# Altium PCB PcbPanel.PcbDoc
Units mm, origin at the board's own origin, x right, y up, seen from the top; angles counter-clockwise.
Board outline 180 x 105.6 mm, 2 copper layers (Top Layer, Bottom Layer), stack 1.092 mm thick; 6 components, 178 nets, 10 pads, 0 vias.
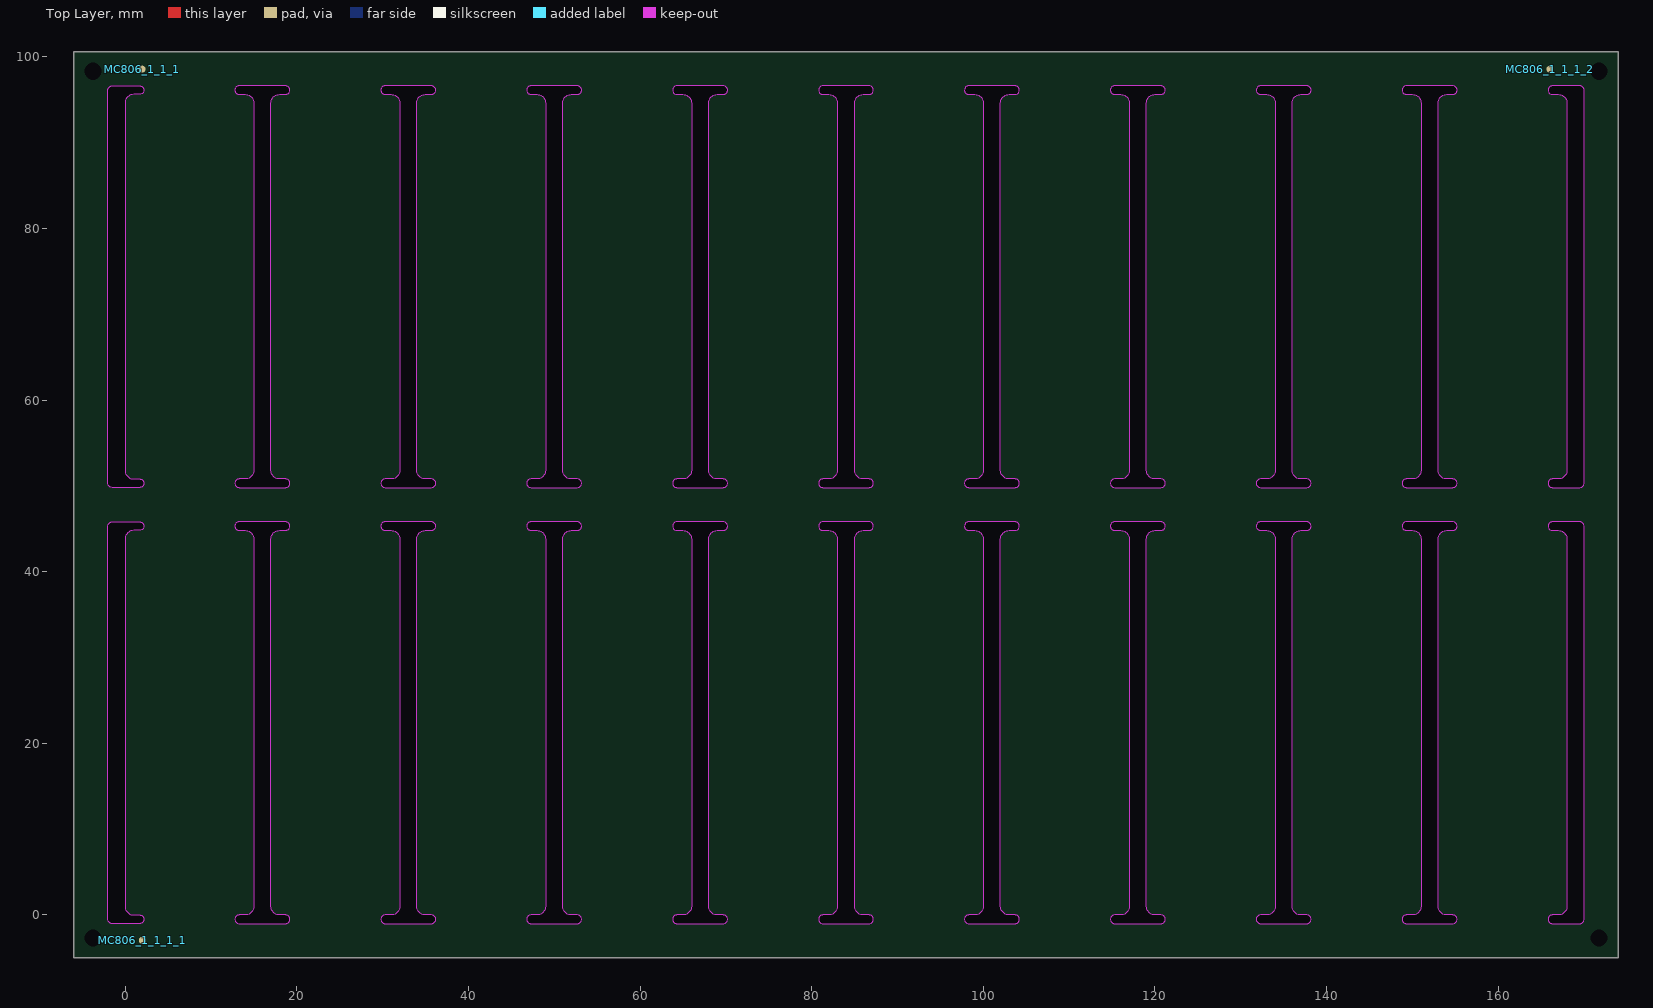
[diagram p0: Top Layer view]
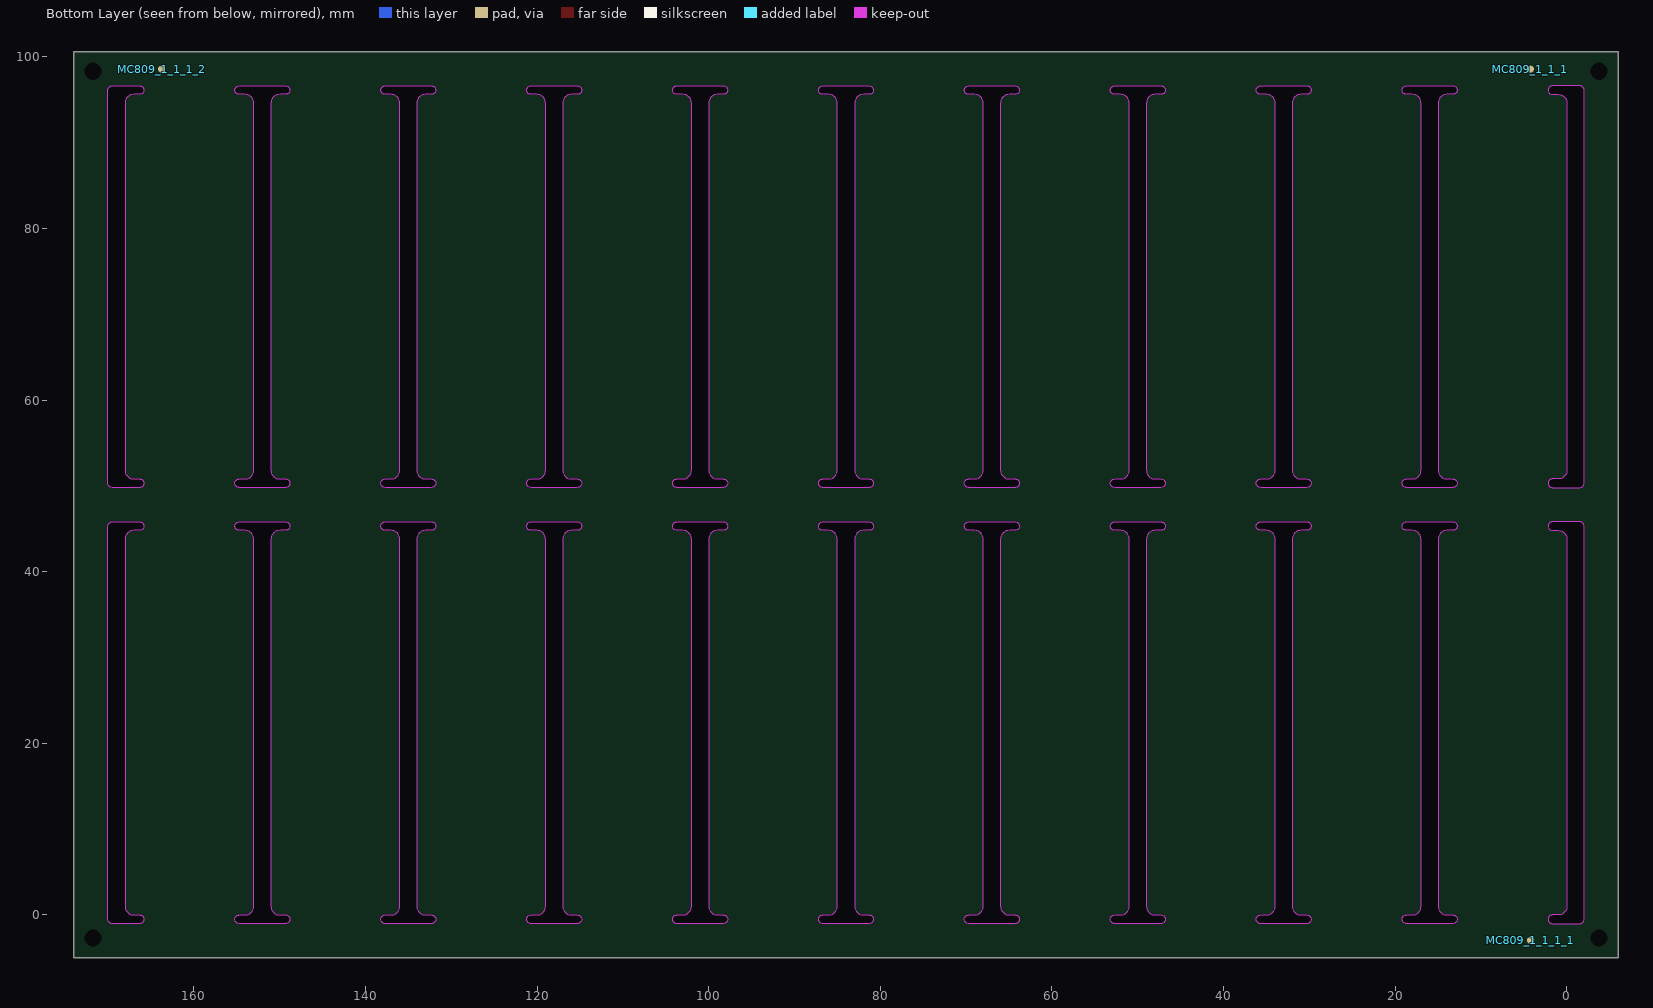
[diagram p1: Bottom Layer view, seen from below]

## Layer stack, top to bottom
Top Solder: solder mask 0.0102, SM-001, Dk 4
Top Layer: signal copper 0.0356
Dielectric 1: prepreg 0.2104, PP-017, Dk 4.3
Dielectric 3: core 0.6, Core-039, Dk 4.8
Dielectric 5: prepreg 0.2104, PP-017, Dk 4.3
Bottom Layer: signal copper 0.0356
Bottom Solder: solder mask 0.0102, SM-001, Dk 4

## Board outline
-6,-5 -6,100.6 174,100.6 174,-5
cut-out: -2,50.3 -2,96.1 cw(c-1.5,96.1) -1.5,96.6 1.7,96.6 cw(c1.7,96.1) 2.2,96.1 cw(c1.7,96.1) 1.7,95.6 1,95.6 ccw(c1,94.6) 0,94.6 0,51.8 ccw(c1,51.8) 1,50.8 1.7,50.8 cw(c1.7,50.3) 2.2,50.3 cw(c1.7,50.3) 1.7,49.8 -1.5,49.8 cw(c-1.5,50.3)
cut-out: 12.8,50.3 ccw(c13.3,50.3) 13.3,49.8 18.7,49.8 ccw(c18.7,50.3) 19.2,50.3 ccw(c18.7,50.3) 18.7,50.8 18,50.8 cw(c18,51.8) 17,51.8 17,94.6 cw(c18,94.6) 18,95.6 18.7,95.6 ccw(c18.7,96.1) 19.2,96.1 ccw(c18.7,96.1) 18.7,96.6 13.3,96.6 ccw(c13.3,96.1) 12.8,96.1 ccw(c13.3,96.1) 13.3,95.6 14,95.6 cw(c14,94.6) 15,94.6 15,51.8 cw(c14,51.8) 14,50.8 13.3,50.8 ccw(c13.3,50.3)
cut-out: 29.8,50.3 ccw(c30.3,50.3) 30.3,49.8 35.7,49.8 ccw(c35.7,50.3) 36.2,50.3 ccw(c35.7,50.3) 35.7,50.8 35,50.8 cw(c35,51.8) 34,51.8 34,94.6 cw(c35,94.6) 35,95.6 35.7,95.6 ccw(c35.7,96.1) 36.2,96.1 ccw(c35.7,96.1) 35.7,96.6 30.3,96.6 ccw(c30.3,96.1) 29.8,96.1 ccw(c30.3,96.1) 30.3,95.6 31,95.6 cw(c31,94.6) 32,94.6 32,51.8 cw(c31,51.8) 31,50.8 30.3,50.8 ccw(c30.3,50.3)
cut-out: 46.8,50.3 ccw(c47.3,50.3) 47.3,49.8 52.7,49.8 ccw(c52.7,50.3) 53.2,50.3 ccw(c52.7,50.3) 52.7,50.8 52,50.8 cw(c52,51.8) 51,51.8 51,94.6 cw(c52,94.6) 52,95.6 52.7,95.6 ccw(c52.7,96.1) 53.2,96.1 ccw(c52.7,96.1) 52.7,96.6 47.3,96.6 ccw(c47.3,96.1) 46.8,96.1 ccw(c47.3,96.1) 47.3,95.6 48,95.6 cw(c48,94.6) 49,94.6 49,51.8 cw(c48,51.8) 48,50.8 47.3,50.8 ccw(c47.3,50.3)
cut-out: 63.8,50.3 ccw(c64.3,50.3) 64.3,49.8 69.7,49.8 ccw(c69.7,50.3) 70.2,50.3 ccw(c69.7,50.3) 69.7,50.8 69,50.8 cw(c69,51.8) 68,51.8 68,94.6 cw(c69,94.6) 69,95.6 69.7,95.6 ccw(c69.7,96.1) 70.2,96.1 ccw(c69.7,96.1) 69.7,96.6 64.3,96.6 ccw(c64.3,96.1) 63.8,96.1 ccw(c64.3,96.1) 64.3,95.6 65,95.6 cw(c65,94.6) 66,94.6 66,51.8 cw(c65,51.8) 65,50.8 64.3,50.8 ccw(c64.3,50.3)
cut-out: 80.8,50.3 ccw(c81.3,50.3) 81.3,49.8 86.7,49.8 ccw(c86.7,50.3) 87.2,50.3 ccw(c86.7,50.3) 86.7,50.8 86,50.8 cw(c86,51.8) 85,51.8 85,94.6 cw(c86,94.6) 86,95.6 86.7,95.6 ccw(c86.7,96.1) 87.2,96.1 ccw(c86.7,96.1) 86.7,96.6 81.3,96.6 ccw(c81.3,96.1) 80.8,96.1 ccw(c81.3,96.1) 81.3,95.6 82,95.6 cw(c82,94.6) 83,94.6 83,51.8 cw(c82,51.8) 82,50.8 81.3,50.8 ccw(c81.3,50.3)
cut-out: 97.8,50.3 ccw(c98.3,50.3) 98.3,49.8 103.7,49.8 ccw(c103.7,50.3) 104.2,50.3 ccw(c103.7,50.3) 103.7,50.8 103,50.8 cw(c103,51.8) 102,51.8 102,94.6 cw(c103,94.6) 103,95.6 103.7,95.6 ccw(c103.7,96.1) 104.2,96.1 ccw(c103.7,96.1) 103.7,96.6 98.3,96.6 ccw(c98.3,96.1) 97.8,96.1 ccw(c98.3,96.1) 98.3,95.6 99,95.6 cw(c99,94.6) 100,94.6 100,51.8 cw(c99,51.8) 99,50.8 98.3,50.8 ccw(c98.3,50.3)
cut-out: 114.8,50.3 ccw(c115.3,50.3) 115.3,49.8 120.7,49.8 ccw(c120.7,50.3) 121.2,50.3 ccw(c120.7,50.3) 120.7,50.8 120,50.8 cw(c120,51.8) 119,51.8 119,94.6 cw(c120,94.6) 120,95.6 120.7,95.6 ccw(c120.7,96.1) 121.2,96.1 ccw(c120.7,96.1) 120.7,96.6 115.3,96.6 ccw(c115.3,96.1) 114.8,96.1 ccw(c115.3,96.1) 115.3,95.6 116,95.6 cw(c116,94.6) 117,94.6 117,51.8 cw(c116,51.8) 116,50.8 115.3,50.8 ccw(c115.3,50.3)
cut-out: 131.8,50.3 ccw(c132.3,50.3) 132.3,49.8 137.7,49.8 ccw(c137.7,50.3) 138.2,50.3 ccw(c137.7,50.3) 137.7,50.8 137,50.8 cw(c137,51.8) 136,51.8 136,94.6 cw(c137,94.6) 137,95.6 137.7,95.6 ccw(c137.7,96.1) 138.2,96.1 ccw(c137.7,96.1) 137.7,96.6 132.3,96.6 ccw(c132.3,96.1) 131.8,96.1 ccw(c132.3,96.1) 132.3,95.6 133,95.6 cw(c133,94.6) 134,94.6 134,51.8 cw(c133,51.8) 133,50.8 132.3,50.8 ccw(c132.3,50.3)
cut-out: 148.8,50.3 ccw(c149.3,50.3) 149.3,49.8 154.7,49.8 ccw(c154.7,50.3) 155.2,50.3 ccw(c154.7,50.3) 154.7,50.8 154,50.8 cw(c154,51.8) 153,51.8 153,94.6 cw(c154,94.6) 154,95.6 154.7,95.6 ccw(c154.7,96.1) 155.2,96.1 ccw(c154.7,96.1) 154.7,96.6 149.3,96.6 ccw(c149.3,96.1) 148.8,96.1 ccw(c149.3,96.1) 149.3,95.6 150,95.6 cw(c150,94.6) 151,94.6 151,51.8 cw(c150,51.8) 150,50.8 149.3,50.8 ccw(c149.3,50.3)
cut-out: 165.8,50.3 ccw(c166.3,50.3) 166.3,49.8 169.5,49.8 ccw(c169.5,50.3) 170,50.3 170,96.1 ccw(c169.5,96.1) 169.5,96.6 166.3,96.6 ccw(c166.3,96.1) 165.8,96.1 ccw(c166.3,96.1) 166.3,95.6 167,95.6 cw(c167,94.6) 168,94.6 168,51.8 cw(c167,51.8) 167,50.8 166.3,50.8 ccw(c166.3,50.3)
cut-out: 165.8,-0.5 ccw(c166.3,-0.5) 166.3,-1 169.5,-1 ccw(c169.5,-0.5) 170,-0.5 170,45.3 ccw(c169.5,45.3) 169.5,45.8 166.3,45.8 ccw(c166.3,45.3) 165.8,45.3 ccw(c166.3,45.3) 166.3,44.8 167,44.8 cw(c167,43.8) 168,43.8 168,1 cw(c167,1) 167,0 166.3,0 ccw(c166.3,-0.5)
cut-out: 148.8,-0.5 ccw(c149.3,-0.5) 149.3,-1 154.7,-1 ccw(c154.7,-0.5) 155.2,-0.5 ccw(c154.7,-0.5) 154.7,0 154,0 cw(c154,1) 153,1 153,43.8 cw(c154,43.8) 154,44.8 154.7,44.8 ccw(c154.7,45.3) 155.2,45.3 ccw(c154.7,45.3) 154.7,45.8 149.3,45.8 ccw(c149.3,45.3) 148.8,45.3 ccw(c149.3,45.3) 149.3,44.8 150,44.8 cw(c150,43.8) 151,43.8 151,1 cw(c150,1) 150,0 149.3,0 ccw(c149.3,-0.5)
cut-out: 131.8,-0.5 ccw(c132.3,-0.5) 132.3,-1 137.7,-1 ccw(c137.7,-0.5) 138.2,-0.5 ccw(c137.7,-0.5) 137.7,0 137,0 cw(c137,1) 136,1 136,43.8 cw(c137,43.8) 137,44.8 137.7,44.8 ccw(c137.7,45.3) 138.2,45.3 ccw(c137.7,45.3) 137.7,45.8 132.3,45.8 ccw(c132.3,45.3) 131.8,45.3 ccw(c132.3,45.3) 132.3,44.8 133,44.8 cw(c133,43.8) 134,43.8 134,1 cw(c133,1) 133,0 132.3,0 ccw(c132.3,-0.5)
cut-out: 114.8,-0.5 ccw(c115.3,-0.5) 115.3,-1 120.7,-1 ccw(c120.7,-0.5) 121.2,-0.5 ccw(c120.7,-0.5) 120.7,0 120,0 cw(c120,1) 119,1 119,43.8 cw(c120,43.8) 120,44.8 120.7,44.8 ccw(c120.7,45.3) 121.2,45.3 ccw(c120.7,45.3) 120.7,45.8 115.3,45.8 ccw(c115.3,45.3) 114.8,45.3 ccw(c115.3,45.3) 115.3,44.8 116,44.8 cw(c116,43.8) 117,43.8 117,1 cw(c116,1) 116,0 115.3,0 ccw(c115.3,-0.5)
cut-out: 97.8,-0.5 ccw(c98.3,-0.5) 98.3,-1 103.7,-1 ccw(c103.7,-0.5) 104.2,-0.5 ccw(c103.7,-0.5) 103.7,0 103,0 cw(c103,1) 102,1 102,43.8 cw(c103,43.8) 103,44.8 103.7,44.8 ccw(c103.7,45.3) 104.2,45.3 ccw(c103.7,45.3) 103.7,45.8 98.3,45.8 ccw(c98.3,45.3) 97.8,45.3 ccw(c98.3,45.3) 98.3,44.8 99,44.8 cw(c99,43.8) 100,43.8 100,1 cw(c99,1) 99,0 98.3,0 ccw(c98.3,-0.5)
cut-out: 80.8,-0.5 ccw(c81.3,-0.5) 81.3,-1 86.7,-1 ccw(c86.7,-0.5) 87.2,-0.5 ccw(c86.7,-0.5) 86.7,0 86,0 cw(c86,1) 85,1 85,43.8 cw(c86,43.8) 86,44.8 86.7,44.8 ccw(c86.7,45.3) 87.2,45.3 ccw(c86.7,45.3) 86.7,45.8 81.3,45.8 ccw(c81.3,45.3) 80.8,45.3 ccw(c81.3,45.3) 81.3,44.8 82,44.8 cw(c82,43.8) 83,43.8 83,1 cw(c82,1) 82,0 81.3,0 ccw(c81.3,-0.5)
cut-out: 63.8,-0.5 ccw(c64.3,-0.5) 64.3,-1 69.7,-1 ccw(c69.7,-0.5) 70.2,-0.5 ccw(c69.7,-0.5) 69.7,0 69,0 cw(c69,1) 68,1 68,43.8 cw(c69,43.8) 69,44.8 69.7,44.8 ccw(c69.7,45.3) 70.2,45.3 ccw(c69.7,45.3) 69.7,45.8 64.3,45.8 ccw(c64.3,45.3) 63.8,45.3 ccw(c64.3,45.3) 64.3,44.8 65,44.8 cw(c65,43.8) 66,43.8 66,1 cw(c65,1) 65,0 64.3,0 ccw(c64.3,-0.5)
cut-out: 46.8,-0.5 ccw(c47.3,-0.5) 47.3,-1 52.7,-1 ccw(c52.7,-0.5) 53.2,-0.5 ccw(c52.7,-0.5) 52.7,0 52,0 cw(c52,1) 51,1 51,43.8 cw(c52,43.8) 52,44.8 52.7,44.8 ccw(c52.7,45.3) 53.2,45.3 ccw(c52.7,45.3) 52.7,45.8 47.3,45.8 ccw(c47.3,45.3) 46.8,45.3 ccw(c47.3,45.3) 47.3,44.8 48,44.8 cw(c48,43.8) 49,43.8 49,1 cw(c48,1) 48,0 47.3,0 ccw(c47.3,-0.5)
cut-out: 29.8,-0.5 ccw(c30.3,-0.5) 30.3,-1 35.7,-1 ccw(c35.7,-0.5) 36.2,-0.5 ccw(c35.7,-0.5) 35.7,0 35,0 cw(c35,1) 34,1 34,43.8 cw(c35,43.8) 35,44.8 35.7,44.8 ccw(c35.7,45.3) 36.2,45.3 ccw(c35.7,45.3) 35.7,45.8 30.3,45.8 ccw(c30.3,45.3) 29.8,45.3 ccw(c30.3,45.3) 30.3,44.8 31,44.8 cw(c31,43.8) 32,43.8 32,1 cw(c31,1) 31,0 30.3,0 ccw(c30.3,-0.5)
cut-out: 12.8,-0.5 ccw(c13.3,-0.5) 13.3,-1 18.7,-1 ccw(c18.7,-0.5) 19.2,-0.5 ccw(c18.7,-0.5) 18.7,0 18,0 cw(c18,1) 17,1 17,43.8 cw(c18,43.8) 18,44.8 18.7,44.8 ccw(c18.7,45.3) 19.2,45.3 ccw(c18.7,45.3) 18.7,45.8 13.3,45.8 ccw(c13.3,45.3) 12.8,45.3 ccw(c13.3,45.3) 13.3,44.8 14,44.8 cw(c14,43.8) 15,43.8 15,1 cw(c14,1) 14,0 13.3,0 ccw(c13.3,-0.5)
cut-out: -2,-0.5 -2,45.3 cw(c-1.5,45.3) -1.5,45.8 1.7,45.8 cw(c1.7,45.3) 2.2,45.3 cw(c1.7,45.3) 1.7,44.8 1,44.8 ccw(c1,43.8) 0,43.8 0,1 ccw(c1,1) 1,0 1.7,0 cw(c1.7,-0.5) 2.2,-0.5 cw(c1.7,-0.5) 1.7,-1 -1.5,-1 cw(c-1.5,-0.5)

## Design rules (kind name [scope] priority, off if disabled: settings)
AssemblyTestPointUsage [All] p1: valid=2
AssemblyTestpoint [(IsPad And (OnTopLayer Or OnBottomLayer))] p1: testpointundercomponent=FALSE minsize=1.016 maxsize=2.54 preferedsize=1.524 minholesize=0 maxholesize=1.016 preferedholesize=0.813 testpointgrid=0.025 usegrid=TRUE gridtolerance=0 allowsidebottom=TRUE
BoardOutlineClearance [All] p1: gap=0.1 ignorepadtopadclearanceinfootprint=FALSE
Clearance [All] p1: gap=0.14 ignorepadtopadclearanceinfootprint=FALSE
ComponentClearance [All] p1 off: gap=0.254 collisioncheckmode=3 verticalgap=0.254 showdistances=FALSE
DiffPairsRouting [All] p1: maxlimit=0.254 minlimit=0.15 mostfreqgap=0.254 toplayer_minwidth=0.14 toplayer_maxwidth=0.381 toplayer_prefwidth=0.2 bottomlayer_minwidth=0.14 bottomlayer_maxwidth=0.381 bottomlayer_prefwidth=0.2 maxuncoupledlength=12.7
Height [All] p1: minheight=0 maxheight=100.4 prefheight=12.7
HoleSize [All] p1: absolutevalues=TRUE maxlimit=10 minlimit=0.127 maxpercent=80.000 minpercent=20.000
HoleToHoleClearance [All] p1: gap=0.241 allowstackedmicrovias=TRUE
MinimumAnnularRing [All] p1: minimumring=0.051
MinimumSolderMaskSliver [All] p1: minsoldermaskwidth=0.05
PasteMaskExpansion [All] p1: expansion=-0.05
PolygonConnect PWR [InNetClass('PWR') vs InNetClass('PWR')] p1: connectstyle=Direct reliefconductorwidth=0.254 reliefentries=4 polygonreliefangle="90 Angle" airgapwidth=0.254
PolygonConnect RF_GND [InNamedPolygon('GND_BOTTOM_RF')] p2: thpad.connectstyle=Relief thpad.reliefconductorwidth=0.254 thpad.reliefentries=4 thpad.polygonreliefangle="90 Angle" thpad.airgapwidth=0.1 smdpad.connectstyle=Relief smdpad.reliefconductorwidth=0.254 smdpad.reliefentries=4 smdpad.polygonreliefangle="90 Angle" smdpad.airgapwidth=0.1 via.connectstyle=Direct via.reliefconductorwidth=0.254 via.reliefentries=4 via.polygonreliefangle="90 Angle" via.airgapwidth=0.254
PolygonConnect GND [InNet('GND')] p3: thpad.connectstyle=Relief thpad.reliefconductorwidth=0.254 thpad.reliefentries=4 thpad.polygonreliefangle="90 Angle" thpad.airgapwidth=0.254 smdpad.connectstyle=Relief smdpad.reliefconductorwidth=0.254 smdpad.reliefentries=4 smdpad.polygonreliefangle="90 Angle" smdpad.airgapwidth=0.254 via.connectstyle=Direct via.reliefconductorwidth=0.254 via.reliefentries=4 via.polygonreliefangle="90 Angle" via.airgapwidth=0.254
PolygonConnect [All] p4: connectstyle=Direct reliefconductorwidth=0.254 reliefentries=4 polygonreliefangle="90 Angle" airgapwidth=0.254
RoutingVias [All] p1: holewidth=0.15 width=0.35 viastyle="Through Hole" minholewidth=0.127 minwidth=0.25 maxholewidth=0.6 maxwidth=1
SilkToSilkClearance [All] p1: silktosilkclearance=0.05
SilkToSolderMaskClearance [IsPad] p1: minsilkscreentomaskgap=0.05 clearancetoexposedcopper=TRUE
SolderMaskExpansion SolderMaskExpansion_via [IsVia] p1: expansion=0.102 istentingtop=TRUE
SolderMaskExpansion [All] p2: expansion=0.025 istentingtop=FALSE
UnRoutedNet [All] p1: checkbadconnections=TRUE
ViasUnderSMD [All] p1: allowed=TRUE
Width RF [InNetClass('RF')] p1: maxlimit=0.762 minlimit=0.154 preferedwidth=0.236 minimp=50.000000 maximp=50.000000 favimp=50.000000
Width [All] p2: maxlimit=30 minlimit=0.122 preferedwidth=0.2
18 further rules are at their usual default settings.

## Classes and differential pairs
net class RF: RF1 RF2 RF3
component class U_LED: Q14 TP1 TP31 U20
component class PABoostConverter: TP14 TP15 TP16
net class PWR: 3V0 5V0 PA_GATE_SWITCH PA_I_DIFF_N PA_I_DIFF_P PA_PRE_L PA_PST_L PABOOST_SW V_LOAD V_PA V_SYS

## Components (designator, comment, footprint, x,y, rotation, side; value= is the part's Value field where it differs from the comment)
MC806_1_1_1 "Mire_CMS" CMSMires 2,98.55 r90 top (schematic designator MC804)
MC806_1_1_1_1 "Mire_CMS" CMSMires 2,-2.95 r270 top (schematic designator MC804)
MC806_1_1_1_2 "Mire_CMS" CMSMires 166,98.55 r90 top (schematic designator MC804)
MC809_1_1_1 "Mire_CMS" CMSMires 4.25,98.55 r90 bottom (schematic designator MC804)
MC809_1_1_1_1 "Mire_CMS" CMSMires 4.25,-2.95 r270 bottom (schematic designator MC804)
MC809_1_1_1_2 "Mire_CMS" CMSMires 163.75,98.55 r90 bottom (schematic designator MC804)

## Footprints (in the part's own frame and the unit in brackets; to place one, negate y for a bottom-side part, rotate by r counter-clockwise, add the part's x,y. Pads: shape width x height; smd on the part's side, far side on the other; paste and mask are expansions set on the pad)
CMSMires [mm]
  round 0.8 smd paste-0.5 mask+0.2: 1(0,0)

## Part data
MC806_1_1_1 MC806_1_1_1_1 MC806_1_1_1_2 MC809_1_1_1 MC809_1_1_1_1 MC809_1_1_1_2: library part CMSMire, "Mire CMS", FAB=MaScir, REF_FAB=MC1

## Free pads (board coordinates)
  round 0 hole 2 unplated: ""(-3.75,98.3) ""(-3.75,-2.7) ""(171.75,98.3) ""(171.75,-2.7)

## Nets (pads, with @x,y where several pads share a name; then routed paths per layer and width w, separated by ;. In a path a pad name is that pad's centre, name@x,y a point inside that pad or via, vN(x,y) a via of type N, cw(c..) or ccw(c..) an arc to the next point about the centre after c; other vN are vias at no path point)
3V0: 
5V0: 
5V0_FB_AuC: 
5V0BOOST_SW: 
ADC_C\S\_uC: 
ADC_DIN_uC: 
ADC_DOUT_uC: 
ADC_SCLK_uC: 
BAT_NTC: 
Battery_Indicators_LED1: 
Battery_Indicators_LED2: 
Battery_LED1: 
Battery_LED2: 
Battery_LED3: 
Battery_LED4: 
BOOST_FB: 
BTN1: 
BTN1_uC: 
BTN2: 
BTN2_uC: 
CAP1: 
CAP1_uC: 
CAP2: 
CAP2_uC: 
CAP3: 
CAP3_uC: 
CAP4: 
CAP4_uC: 
CAP5: 
CAP5_uC: 
CAP6: 
CAP6_uC: 
CHG_BTST: 
CHG_ILIM: 
CHG_PMIP: 
CHG_QON: 
CHG_REGN: 
CHG_SW: 
CHG_TS_BIAS: 
Continuous_LED1: 
Continuous_LED2: 
DCC: 
DEC1: 
DEC3: 
DEC4_6: 
DEC5: 
Fluid_Indicators_LED1: 
Fluid_Indicators_LED2: 
GND: 
ILOAD: 
Intermittant_LED1: 
Intermittant_LED2: 
LED_SCL: 
LED_SDA: 
Neb_Indicators_LED1: 
Neb_Indicators_LED2: 
NetC200_2: 
NetC202_1: 
NetC216_1: 
NetC218_1: 
NetC219_1: 
NetC220_1: 
NetC222_1: 
NetC223_1: 
NetC225_2: 
NetC226_2: 
NetC407_2: 
NetC413_2: 
NetC500_1: 
NetC500_2: 
NetC501_2: 
NetC502_2: 
NetC503_1: 
NetC503_2: 
NetC504_1: 
NetC504_2: 
NetC700_2: 
NetC713_2: 
NetC903_2: 
NetC908_1: 
NetC919_1: 
NetJ700_1: 
NetJ700_2: 
NetL800_1: 
NetQ200_1: 
NetQ201_1: 
NetQ202_1: 
NetQ203_1: 
NetQ204_1: 
NetQ205_1: 
NetQ206_1: 
NetQ207_1: 
NetQ600_2: 
NetQ600_3: 
NetQ601_2: 
NetQ601_3: 
NetQ700_2: 
NetQ700_3: 
NetQ900_2: 
NetQ900_3: 
NetR209_1: 
NetR404_2: 
NetR407_2: 
NetR600_1: 
NetR602_1: 
NetR700_1: 
NetR709_1: 
NetR712_2: 
NetR713_1: 
NetR713_2: 
NetR900_1: 
NetR901_1: 
NetR904_2: 
NetR905_1: 
NetR906_2: 
NetR907_1: 
NetR915_2: 
NetTP704_TP: 
NetTP705_TP: 
NetTP706_TP: 
NetTP707_TP: 
NetTP708_TP: 
NetTP709_TP: 
NetU600_2: 
NetU600_3: 
NetU703_1: 
NetU704_1: 
NetU705_1: 
NetU800_A16: 
NetU800_B17: 
NetU800_B19: 
P0.00/XL1: 
P0.01/XL2: 
PA_GATE_HG: 
PA_GATE_LG: 
PA_GATE_SWITCH: 
PA_I_AuC: 
PA_I_DIFF_N: 
PA_I_DIFF_P: 
PA_PRE_L: 
PA_PST_L: 
PABOOST_BST: 
PABOOST_COMP: 
PABOOST_DAC_OUT: 
PABOOST_FB: 
PABOOST_SW: 
PABOOST_VCC: 
Power_Adapter_LED1: 
Power_Adapter_LED2: 
RF1: 
RF2: 
RF3: 
RST: 
RX: 
SCL_uC: 
SDA_uC: 
SUPPLY_PROT_PG_uC: 
SWDCLK: 
SWDIO: 
System_Indicators_LED1: 
System_Indicators_LED2: 
TEMP_ALERT_uC: 
TEST0: 
TEST1: 
TX: 
V_BAT: 
V_EXT: 
V_LOAD: 
V_LOAD_ENV: 
V_LOAD_ENV_FB_AuC: 
V_PA: 
V_PA_EN_uC: 
V_PA_FB_AuC: 
V_PA_IN_FB_AuC: 
V_SUPPLY: 
V_SYS: 
XC1: 
XC2: 
pads on no net: MC806_1_1_1.1 MC806_1_1_1_1.1 MC806_1_1_1_2.1 MC809_1_1_1.1 MC809_1_1_1_1.1 MC809_1_1_1_2.1

## Silkscreen, mask and mechanical layers (free items; w line width, h text height)
Dimensions:
  lines w0.127: -11.034,-5 -6.284,-5 ; -10.934,100.6 -6.184,100.6 ; -6,100.75 -6,105.5 ; 174,100.75 174,105.5
  lines w0.254: -12.667,0 -11,-5 ; -12.667,95.6 -11,100.6 ; -11.254,-5 -10.746,-5 ; -11.254,100.6 -10.746,100.6 ; -11,37.018 -11,-5 ; -11,58.582 -11,100.6 ; -9.333,0 -11,-5 ; -9.333,95.6 -11,100.6 ; -6,105.346 -6,105.854 ; -1,103.933 -6,105.6 ; -1,107.267 -6,105.6 ; 74.965,105.6 -6,105.6 ; 93.035,105.6 174,105.6 ; 169,103.933 174,105.6 ; 169,107.267 174,105.6 ; 174,105.346 174,105.854
  text "180 (mm)" at 75.219,103.661 h5
  text "105.6 (mm)" at -9.061,37.272 h5 r90
Panel Shape/ Cutout:
  drawing of 472 lines, arcs and shapes, not listed
  text "CNC" at -1.55,95.65 h0.6
  text "CNC" at 15.25,95.65 h0.6
  text "CNC" at 32.25,95.65 h0.6
  text "CNC" at 49.25,95.65 h0.6
  text "CNC" at 66.25,95.65 h0.6
  text "CNC" at 83.25,95.65 h0.6
  text "CNC" at 100.25,95.65 h0.6
  text "CNC" at 117.25,95.65 h0.6
  text "CNC" at 134.25,95.65 h0.6
  text "CNC" at 151.25,95.65 h0.6
  text "CNC" at 167.95,95.65 h0.6
  text "V-CUT" at 179.3,94.95 h1.1
  text "V-CUT" at 179.3,50.15 h1.1
  text "CNC" at -1.55,44.85 h0.6
  text "CNC" at 15.25,44.85 h0.6
  text "CNC" at 32.25,44.85 h0.6
  text "CNC" at 49.25,44.85 h0.6
  text "CNC" at 66.25,44.85 h0.6
  text "CNC" at 83.25,44.85 h0.6
  text "CNC" at 100.25,44.85 h0.6
  text "CNC" at 117.25,44.85 h0.6
  text "CNC" at 134.25,44.85 h0.6
  text "CNC" at 151.25,44.85 h0.6
  text "CNC" at 167.95,44.85 h0.6
  text "V-CUT" at 179.3,44.15 h1.1
  text "V-CUT" at 179.3,-0.65 h1.1

## Panel: embedded boards
"Pcb.PcbDoc" at 0,95.6, 10 rows x 1 columns, spacing 17 x 47.8, rotation 270
"Pcb.PcbDoc" at 0,44.8, 10 rows x 1 columns, spacing 17 x 47.8, rotation 270